# EAGLE board WifiBee v1.0 (EAGLE 5.10)
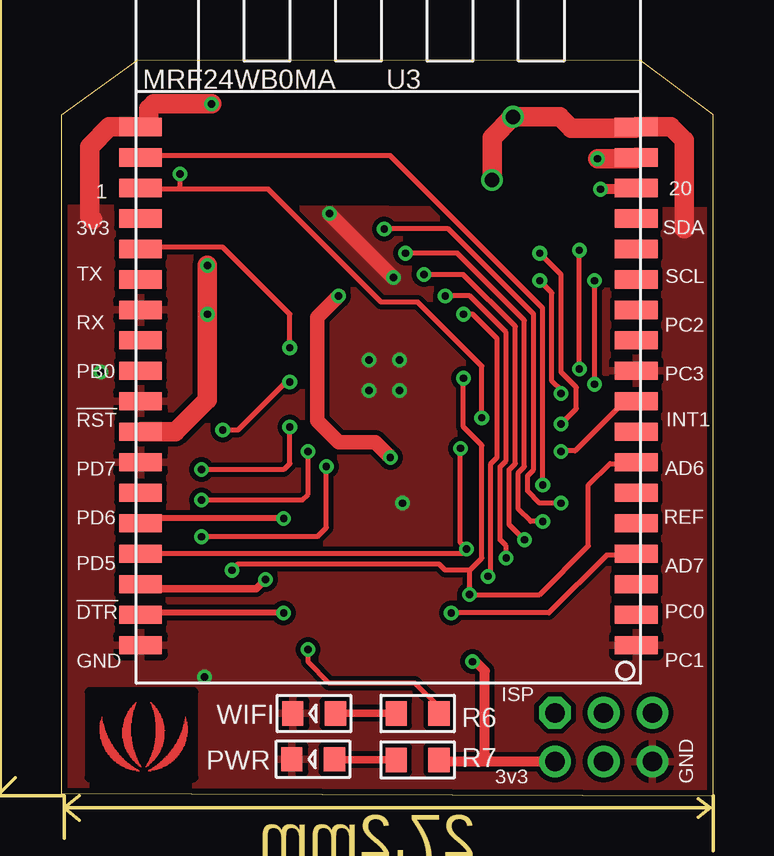
[diagram p0: board, top side]
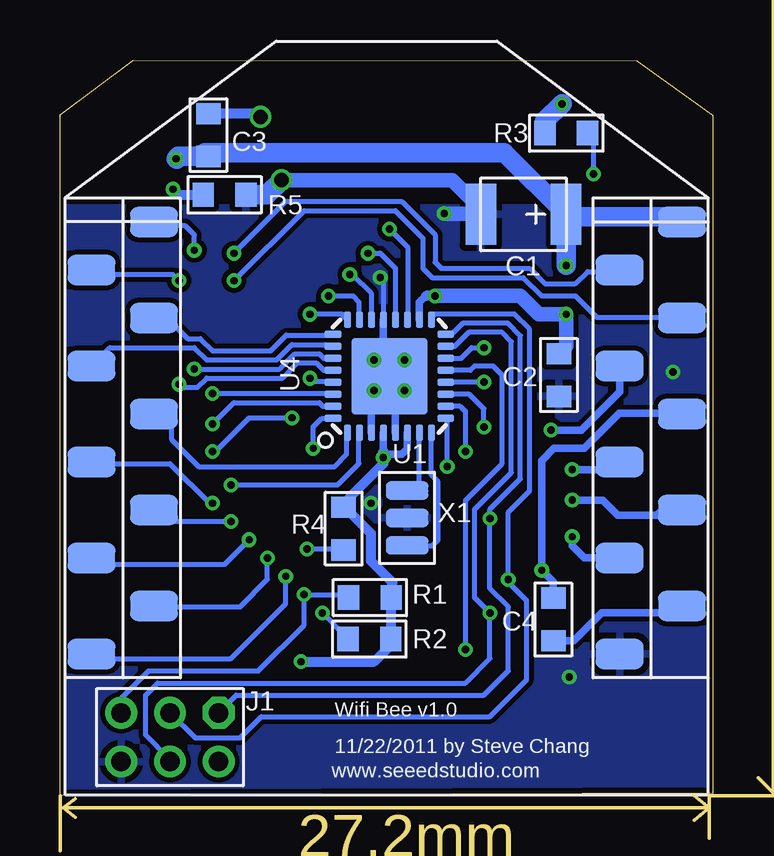
[diagram p1: board, bottom side, seen from below]

Size 27.18 x 30.66 mm. Coordinates in mm from the lower left corner, seen from the top.
Outline: 24.14,30.66 27.18,28.37 27.18,0 0,0.1 0,28.35 3.15,30.63 3.15,30.63 24.14,30.66
Outline: 24.14,30.66 24.14,30.66
Copper layers (1*16): Top 0.035mm / dielectric 1.5mm / Bottom 0.035mm
Design rules "SeeedStudio_rule_no_angle_090911": minimum track width 6mil, minimum drill 12mil, track to track 6mil, track to pad 6mil, pad to pad 6mil, via to via 6mil, smd to smd 0mil, copper to edge 10mil, drill to drill 10mil, minimum pad ring 10mil, minimum via ring 6mil, stop-mask expansion 2mil, vias tented up to drill 100mil, thermal gap 10mil
tRestrict: area 1.2,0.8 to 5.5,4.3
Milling: 26 lines

## Footprints (pad centres in the part's own frame; a part is rotated, then mirrored left to right if it is on the bottom)
C_TAN_3X3.5 = smd 2.54 x 1.27: + 0,1.778; - 0,-1.778
0603 = smd 0.889 x 1.016: 1 -0.889,0; 2 0.889,0
CK_2X3_2.0 = drill 0.813 pad 1.27 octagon: 1 -1.016,2.032 | drill 0.813 pad 1.27 round: 2 -1.016,0; 3 -1.016,-2.032; 4 1.016,-2.032; 5 1.016,0; 6 1.016,2.032
LED0603 = smd 0.889 x 1.016: 1 -0.889,0; 2 0.889,0
XBEE_EXT_SMD = smd 2 x 1.27: 1 12.3,9; 2 9.7,7; 3 12.3,5; 4 9.7,3; 5 12.3,1; 6 9.7,-1; 7 12.3,-3; 8 9.7,-5; 9 12.3,-7; 10 9.7,-9; 11 -12.3,-9; 12 -9.7,-7; 13 -12.3,-5; 14 -9.7,-3; 15 -12.3,-1; 16 -9.7,1; 17 -12.3,3; 18 -9.7,5; 19 -12.3,7; 20 -9.7,9
MRF24WB0MA = smd 1.778 x 0.762: 1 -10.624,23.695; 2 -10.624,22.425; 3 -10.624,21.155; 4 -10.624,19.885; 5 -10.624,18.615; 6 -10.624,17.345; 7 -10.624,16.075; 8 -10.624,14.805; 9 -10.624,13.535; 10 -10.624,12.265; 11 -10.624,10.995; 12 -10.624,9.725; 13 -10.624,8.455; 14 -10.624,7.185; 15 -10.624,5.915; 16 -10.624,4.645; 17 -10.624,3.375; 18 -10.624,2.105; 19 10.034,2.105; 20 10.034,3.375; 21 10.034,4.645; 22 10.034,5.915; 23 10.034,7.185; 24 10.034,8.455; 25 10.034,9.725; 26 10.034,10.995; 27 10.034,12.265; 28 10.034,13.535; 29 10.034,14.805; 30 10.034,16.075; 31 10.034,17.345; 32 10.034,18.615; 33 10.034,19.885; 34 10.034,21.155; 35 10.034,22.425; 36 10.034,23.695
MLF32X = smd 0.7 x 0.3: 1 -2.35,1.75; 2 -2.35,1.25; 3 -2.35,0.75; 4 -2.35,0.25; 5 -2.35,-0.25; 6 -2.35,-0.75; 7 -2.35,-1.25; 8 -2.35,-1.75; 17 2.35,-1.75; 18 2.35,-1.25; 19 2.35,-0.75; 20 2.35,-0.25; 21 2.35,0.25; 22 2.35,0.75; 23 2.35,1.25; 24 2.35,1.75 | smd 0.3 x 0.7: 9 -1.75,-2.35; 10 -1.25,-2.35; 11 -0.75,-2.35; 12 -0.25,-2.35; 13 0.25,-2.35; 14 0.75,-2.35; 15 1.25,-2.35; 16 1.75,-2.35; 25 1.75,2.35; 26 1.25,2.35; 27 0.75,2.35; 28 0.25,2.35; 29 -0.25,2.35; 30 -0.75,2.35; 31 -1.25,2.35; 32 -1.75,2.35 | smd 3.175 x 3.175: HEAT 0,0
XTAL_3X2 = smd 0.762 x 1.778: 1 -1.143,0; 2 0,0; 3 1.143,0

## Placement (x,y rotation side)
C1  10u  [C_TAN_3X3.5]  7.88,24.23 270 bottom
C2  1u  [0603]  6.41,17.53 90 bottom
C3  1u  [0603]  21.01,27.53 270 bottom
C4  100n  [0603]  6.63,7.35 90 bottom
J1  CK_2X3_2.0  [CK_2X3_2.0]  22.61,2.44 270 bottom
PWR  red  [LED0603]  10.5,1.52 180 top
R1  10k  [0603]  14.28,8.26 180 bottom
R2  4.7k  [0603]  14.3,6.53 0 bottom
R3  4.7k  [0603]  6.1,27.61 0 bottom
R4  4.7k  [0603]  15.37,11.13 90 bottom
R5  4.7k  [0603]  20.33,25.04 180 bottom
R6  1k  [0603]  14.86,3.43 180 top
R7  4.7k  [0603]  14.86,1.5 180 top
U1  OPEN_BEE  [XBEE_EXT_SMD]  13.57,14.91 0 bottom
U3  MRF24WB0MA  [MRF24WB0MA]  13.35,29.97 180 top
U4  ATmega328P_MU1040  [MLF32X]  13.47,17.48 90 bottom
U$1  [LOGO_COPPER_150X124]  3.43,2.16 0 top
WIFI  blue  [LED0603]  10.54,3.43 180 top
X1  16MHz  [XTAL_3X2]  12.73,11.58 270 bottom

## Library data of the parts
C1 PWR R1-R7 WIFI X1 = CPT_SMD
C2-C4 = CPT_SMD; C0603: 100N
J1 = CONNECTER
U1 U3 = EXT_moudle
U4 = ICs_v54
U$1 = logo

## Nets
3.3V: C1.+ C2.2 C3.2 J1.6 R1.1 R2.2 R4.2 R7.1 U1.1 U3.17 U3.29 U4.4 U4.6 U4.18
!J_RST: R3.2 U3.9 U3.21
!RESET: C4.2 J1.3 R1.2 U1.5 U3.7 U4.29
ADC6: U1.15 U4.19
ADC7: U1.13 U4.22
AREF: U1.14 U4.20
GND: C1.- C2.1 C3.1 J1.4 PWR.2 R3.1 R5.1 U1.10 U3.1 U3.10 U3.18 U3.19 U3.25 U3.28 U3.30 U3.36 U4.3 U4.5 U4.21 U4.HEAT WIFI.2 X1.2
INT0: R4.1 U3.33 U4.32
INT1: U1.16 U4.1
MISO: J1.1 U3.32 U4.16
MOSI: J1.5 U3.35 U4.15
N$1: C4.1 U1.9
N$3: R5.2 U3.16
N$5: R2.1 U3.4
N$7: R6.2 WIFI.1
N$8: PWR.1 R7.2
N$11: U4.7 X1.1
N$13: U4.8 X1.3
PB0: U1.4 U4.12
PB1: R6.1 U4.13
PC0: U1.12 U4.23
PC1: U1.11 U4.24
PC2: U1.18 U4.25
PC3: U1.17 U4.26
PD4: U3.20 U4.2
PD5: U1.8 U4.9
PD6: U1.7 U4.10
PD7: U1.6 U4.11
RX: U1.3 U4.30
SCK: J1.2 U3.34 U4.17
SCL: U1.19 U4.28
SDA: U1.20 U4.27
SS: U3.23 U4.14
TX: U1.2 U4.31

## Tracks (layer width: path | path; a pad name or v marks a point on that pad's centre or on a via)
3.3V  (via drill 0.3)
  Top 0.305: 15.82,1.43 R7.1
  Top 0.406: v17.15,5.59 17.28,5.59 17.66,5.21 17.66,1.68 | 17.91,1.43 17.66,1.68 | J1.6 17.91,1.43 | 17.91,1.43 15.82,1.43 | 17.66,1.68 17.66,1.65 17.45,1.45
  Top 0.61: v11.56,20.83 10.67,19.94 10.67,15.62 11.56,14.73 13.09,14.73 v13.72,14.1
  Top 0.813: v22.36,26.54 23.92,26.54 U3.17 | v6.1,22.1 v6.1,20.07 6.1,16.51 4.75,15.16 U3.29
  Bottom 0.305: 11.94,20.83 12.22,20.55 U4.18 | U4.6 12.72,14.47 12.96,14.22 13.59,14.22 13.72,14.35 U4.4
  Bottom 0.406: v11.56,20.83 11.94,20.83 | 13.72,14.35 v13.72,14.1 13.72,13.84 15.12,12.45 15.12,12.27 R4.2 15.33,12.02 14.23,10.92 14.23,9.78 13.34,8.89 13.34,8.31 R1.1 13.39,6.55 R2.2 13.41,6.28 14.1,5.59 v17.15,5.59
  Bottom 0.61: v11.56,20.83 8.01,20.83 7.24,20.07 v6.1,20.07 6.1,18.73 C2.2
  Bottom 0.813: 22.33,26.51 v22.36,26.54 22.26,26.64 C3.2 21.17,26.8 8.67,26.8 C1.+ | C1.+ 6,24.13 1.5,24.13 U1.1 | v6.1,22.1 C1.+
!J_RST  (via drill 0.3)
  Top 0.152: U3.9 23.77,16.64 | 3.37,25.27 U3.21
  Top 0.203: v17.53,15.75 17.53,17.91 14.86,20.57 13.34,20.57 8.64,25.27 4.83,25.27 | 4.83,25.27 3.37,25.27 | v4.96,25.91 4.96,25.4 4.83,25.27 | U3.9 23.48,16.44 21.42,14.38 20.86,14.38 v20.83,14.35
  Bottom 0.152: 4.96,27.36 R3.2
  Bottom 0.203: v17.53,15.75 19.31,15.75 20.71,14.35 v20.83,14.35 | v4.96,25.91 4.96,27.36
!RESET  (via drill 0.3)
  Top 0.152: 23.92,13.84 U3.7
  Top 0.203: 23.92,13.84 22.86,13.84 21.98,12.95 21.98,10.41 19.94,8.38 v17.02,8.38 17.02,9.4 | v16.77,17.4 16.77,15.37 17.53,14.61 17.53,9.91 17.02,9.4 | v7.12,9.4 7.37,9.65 15.75,9.65 16.01,9.4 17.02,9.4
  Bottom 0.152: 15.86,17.27 U4.29 | 15.3,8.38 R1.2
  Bottom 0.203: 15.86,17.27 16.64,17.27 v16.77,17.4 | J1.3 24.64,4.06 23.5,5.21 18.93,5.21 17.02,7.11 v17.02,8.38 15.3,8.38
  Bottom 0.305: C4.2 6.63,8.91 v7.12,9.4 7.12,13.97 6.61,14.48 5.34,14.48 3.88,15.93 1.3,15.93 U1.5
ADC6  (via drill 0.3)
  Top 0.203: v20.83,12.19 19.94,12.19 19.44,12.7 19.44,13.34 19.69,13.59 19.69,20.07 16.13,23.62 v13.47,23.62
  Bottom 0.152: U1.15 25.81,13.84
  Bottom 0.203: v20.83,12.19 20.96,12.19 22.61,13.84 25.81,13.84 | v13.47,23.62 12.71,22.86 12.71,19.84
  Bottom 0.254: 12.71,19.84 U4.19
ADC7  (via drill 0.3)
  Top 0.203: v19.31,10.67 18.67,11.3 18.67,13.59 18.93,13.84 18.93,19.56 16.77,21.72 v15.12,21.72
  Bottom 0.152: 14.23,19.84 U4.22
  Bottom 0.203: v15.12,21.72 14.99,21.72 14.23,20.95 14.23,19.84 | v19.31,10.67 20.32,9.65 25.64,9.65 25.64,9.67 U1.13
AREF  (via drill 0.3)
  Top 0.203: v20.07,11.43 19.56,11.43 19.05,11.94 19.05,13.46 19.31,13.72 19.31,19.81 16.52,22.61 v14.36,22.61
  Bottom 0.152: U4.20
  Bottom 0.203: 22.8,11.43 23.38,11.43 | v14.36,22.61 13.85,22.61 13.21,21.97 U4.20 | 22.8,11.43 v20.07,11.43 | U1.14 22.8,11.43
GND  (via drill 0.3, 0.6)
  Top 0.406: 3.66,27.87 U3.19
  Top 0.61: v11.18,24.26 v13.85,21.59
  Top 0.813: 1.32,24 1.19,24.13 1.19,27.05 2.01,27.87 3.66,27.87 3.66,28.63 3.86,28.83 v6.27,28.83 | 25.96,23.62 25.96,27.3 25.4,27.87 U3.18 23.92,27.81 21.26,27.81 20.78,28.29 v18.83,28.29 17.96,27.42 v17.96,25.65
  Bottom 0.152: 9.94,24.51 C1.-
  Bottom 0.203: U4.21 13.72,21.46 v13.85,21.59
  Bottom 0.305: U4.21 13.72,18.8 | 13.72,18.8 13.59,18.67 | U4.5 13.22,17.23 U4.HEAT | U4.3 14.22,16.73 U4.HEAT | U4.HEAT 13.47,17.78 | v14.1,16.89 14.06,16.89 U4.HEAT | 13.72,18.8 13.72,17.73 U4.HEAT
  Bottom 0.406: C3.1 18.96,28.42 v18.83,28.29
  Bottom 0.61: v11.18,24.26 9.69,24.26 C1.- | 9.94,24.51 9.94,24.75 10.85,25.65 v17.96,25.65
  Bottom 0.813: R3.1 6.99,28.12 v6.27,28.83 | R5.1 18.57,25.04 v17.96,25.65
  other vias: 14.1,18.16 5.97,4.95 14.23,12.19 1.66,17.65 12.83,18.16 12.83,16.89
  pour Top (isolate 0.203): 26.93,24.38 0.39,24.51 0.39,0.13 26.93,0
  pour Bottom (isolate 0.203): 26.93,24.51 0.39,24.51 0.39,0.13 26.93,0.13
INT0  (via drill 0.3)
  Top 0.203: v16.64,14.48 16.64,10.54 v16.9,10.29 16.7,10.09 U3.33
  Bottom 0.152: 15.42,10.29 R4.1
  Bottom 0.203: U4.32 16.28,15.73 16.64,15.37 v16.64,14.48 | v16.9,10.29 15.42,10.29
INT1
  Bottom 0.152: 15.24,15.1 U4.1
  Bottom 0.203: 15.24,15.1 15.24,14.22 15.75,13.72 21.42,13.72 22.54,14.83 22.54,15.75 22.61,15.82 23.19,15.82 U1.16
MISO  (via drill 0.3)
  Top 0.254: 3.38,11.43 U3.32 3.51,11.56 v9.28,11.56
  Bottom 0.203: U4.16 10.86,19.24 10.42,19.68 8.51,19.68 8.01,19.18 8.01,13.21 9.28,11.94 v9.28,11.56 9.28,8.64 8.51,7.87 8.51,5.21 9.53,4.19 19.85,4.19 J1.1
  Bottom 0.254: U4.16
MOSI  (via drill 0.3)
  Top 0.254: v9.28,7.62 3.38,7.62 U3.35
  Bottom 0.203: U4.15 10.74,18.73 10.16,19.3 8.77,19.3 8.39,18.92 8.39,13.46 9.91,11.94 9.91,8.26 v9.28,7.62 9.28,5.71 10.29,4.7 23.12,4.7 23.63,4.19 23.63,2.54 22.61,1.52 J1.5
N$1
  Bottom 0.305: C4.1 5.79,6.46 4.62,7.62 1.56,7.62 U1.9
N$3  (via drill 0.3)
  Top 0.406: v22.48,25.27 23.92,25.27 U3.16
  Bottom 0.406: R5.2 22.26,25.04 v22.48,25.27
N$5  (via drill 0.3)
  Top 0.152: U3.4 23.92,10.03
  Top 0.203: v16.26,7.62 20.32,7.62 22.74,10.03 23.92,10.03
  Bottom 0.203: v16.26,7.62 15.3,6.66 15.3,6.63 R2.1
N$7
  Top 0.305: R6.2 WIFI.1
N$8
  Top 0.305: R7.2 11.41,1.5 PWR.1
N$11
  Bottom 0.203: U4.7 12.22,12.97 11.94,12.7 12.71,12.7 X1.1
N$13
  Bottom 0.152: X1.3 12.71,10.41
  Bottom 0.203: U4.8 11.72,13.36 11.44,13.08 11.44,10.67 11.69,10.41 12.71,10.41
PB0  (via drill 0.3)
  Top 0.203: v9.53,17.25 9.38,17.25 7.37,15.24 v6.74,15.24
  Bottom 0.152: U4.12 11.1,17.25
  Bottom 0.203: 11.1,17.25 v9.53,17.25
  Bottom 0.305: v6.74,15.24 5.47,15.24 3.87,16.84 U1.4
PB1  (via drill 0.3)
  Top 0.152: R6.1 15.75,3.68
  Top 0.203: 15.75,3.68 14.74,4.7 11.18,4.7 10.29,5.59 v10.29,6.1
  Top 0.254: R6.1
  Bottom 0.203: U4.13 10.09,17.73 9.91,17.91 9.15,17.91 8.77,17.53 8.77,13.84 10.29,12.32 v10.29,6.1
PC0  (via drill 0.3)
  Top 0.203: v18.55,9.91 18.55,10.41 18.29,10.67 18.29,13.72 18.55,13.97 18.55,19.3 17.02,20.83 v16.01,20.83
  Bottom 0.152: U1.12 23.24,7.87
  Bottom 0.203: v16.01,20.83 14.99,20.83 14.74,20.57 14.74,19.85 | v18.55,9.91 18.55,9.02 19.69,7.87 23.24,7.87
  Bottom 0.254: 14.74,19.85 U4.23
PC1  (via drill 0.3)
  Top 0.203: v17.79,9.14 17.91,9.27 17.91,13.84 18.17,14.1 18.17,19.05 17.15,20.07 v16.77,20.07
  Bottom 0.152: v16.77,20.07 15.45,20.07
  Bottom 0.203: v17.79,9.14 17.79,8 20.07,5.71 25.68,5.71 U1.11 | 15.45,20.07 16.8,20.07 | 15.45,20.07 U4.24 | 15.45,20.07 15.22,20.07 15.17,20.02
PC2
  Bottom 0.152: 15.85,19.2 U4.25
  Bottom 0.203: 15.85,19.2 17.77,19.2 18.42,18.54 20.83,18.54 21.34,19.05 21.88,19.05 22.73,19.91 U1.18
PC3
  Bottom 0.203: U4.26 16.09,18.73 16.16,18.8 17.53,18.8 18.17,18.16 21.09,18.16 21.59,18.67 25.11,18.67 U1.17
PD4  (via drill 0.3)
  Top 0.152: 3.38,26.67 U3.20
  Top 0.203: v20.07,12.95 20.07,20.32 13.72,26.67 3.38,26.67
  Bottom 0.152: 14.74,15.11 U4.2
  Bottom 0.203: 14.74,15.11 14.74,13.84 15.63,12.95 v20.07,12.95
PD5  (via drill 0.3)
  Top 0.203: v11.05,13.72 11.05,11.18 10.67,10.79 v5.85,10.79
  Bottom 0.152: 11.05,15.67 U4.9
  Bottom 0.203: v11.05,13.72 11.05,15.67
  Bottom 0.305: U1.8 5.34,9.91 5.85,10.41 v5.85,10.79
PD6  (via drill 0.3)
  Top 0.203: v10.29,14.35 10.29,12.57 10.04,12.32 v5.85,12.32
  Bottom 0.203: U4.10 10.52,16.23 10.29,16 v10.29,14.35
  Bottom 0.254: 2,12.06 2.38,11.68
  Bottom 0.305: v5.85,12.32 4.58,12.32 3.94,11.68 1.62,11.68 | U1.7 1.5,11.68 1.62,11.68 | 1.62,11.68 2,12.06
PD7  (via drill 0.3)
  Top 0.203: v9.53,15.37 9.53,13.84 9.28,13.59 v5.85,13.59
  Bottom 0.203: U4.11 10.13,16.73 9.53,16.13 v9.53,15.37
  Bottom 0.305: v5.85,13.59 3.73,13.59 3.73,13.77 U1.6
RX  (via drill 0.3, 0.3 pad 0.61)
  Top 0.203: v20.83,16.76 20.83,16.89 20.45,17.27 20.45,20.95 v19.94,21.46
  Bottom 0.152: 15.85,16.76 U4.30 | 1.3,19.93 U1.3
  Bottom 0.203: v20.83,16.76 15.85,16.76 | v19.94,21.46 17.02,24.38 13.21,24.38 12.07,23.24 12.07,21.97 11.69,21.59 7.88,21.59 7.12,20.83 5.72,20.83 4.83,19.93 1.3,19.93
SCK  (via drill 0.3)
  Top 0.305: 3.51,9.02 U3.34 3.49,8.64 8.13,8.64 v8.51,9.02
  Bottom 0.203: 11.72,19.91 11.56,20.07 8.26,20.07 7.62,19.43 7.62,12.7 8.51,11.81 v8.51,9.02 8.51,8.89 7.75,8.13 7.75,4.83 9.28,3.3 18.8,3.3 19.69,2.41 21.57,2.41 J1.2
  Bottom 0.254: 11.72,19.91 U4.17
SCL  (via drill 0.3)
  Top 0.203: v22.23,17.14 v22.23,21.46
  Bottom 0.203: U4.28 16.21,17.73 16.52,18.03 17.28,18.03 17.91,17.4 21.09,17.4 21.47,17.02 22.1,17.02 v22.23,17.14 | v22.23,21.46 22.48,21.72 25.68,21.72 U1.19
SDA  (via drill 0.3)
  Top 0.203: v21.59,17.78 v21.59,22.73
  Bottom 0.203: U4.27 16.2,18.23 16.39,18.41 17.4,18.41 18.04,17.78 v21.59,17.78 | v21.59,22.73 21.59,23.37 21.98,23.75 23.37,23.75 | 23.37,23.75 23.61,23.75 | U1.20 23.27,23.85 23.37,23.75
SS  (via drill 0.3)
  Top 0.203: 3.38,22.86 6.74,22.86 9.53,20.07 v9.53,18.67
  Top 0.254: 3.38,22.86 U3.23
  Bottom 0.203: U4.14 10.48,18.23 10.04,18.67 v9.53,18.67
TX  (via drill 0.3, 0.3 pad 0.61)
  Top 0.203: v19.94,22.61 20.83,21.72 20.83,17.65 21.47,17.02 21.47,16.13 v20.83,15.49
  Bottom 0.152: 3.94,21.84 U1.2
  Bottom 0.203: U4.31 16.24,16.23 16.39,16.38 19.94,16.38 v20.83,15.49 | v19.94,22.61 17.79,24.77 12.96,24.77 11.56,23.37 11.56,22.23 11.31,21.97 7.62,21.97 6.99,21.34 5.72,21.34 5.21,21.84 3.94,21.84

## Text on the board
tPlace: 1 | 20 | SDA | 3v3 | SCL | TX | PC2 | RX | PC3 | PB0 | INT1 | !RST | AD6 | PD7 | REF | PD6 | AD7 | PD5 | PC0 | !DTR | PC1 | GND | ISP | 3v3 | GND
bPlace: Wifi Bee v1.0 | 11/22/2011 by Steve Chang | www.seeedstudio.com
Milling: 21.0mm | 35.7mm | 27.2mm